# Altium PCB BQ51013a.PcbDoc
Units mil, origin at the board's own origin, x right, y up, seen from the top; angles counter-clockwise.
Board outline 6000 x 4000 mil, 2 copper layers (Top Layer, Bottom Layer); 15 components, 16 nets, 33 pads, 0 vias.
Unrouted connection lines stored in the file: 17.
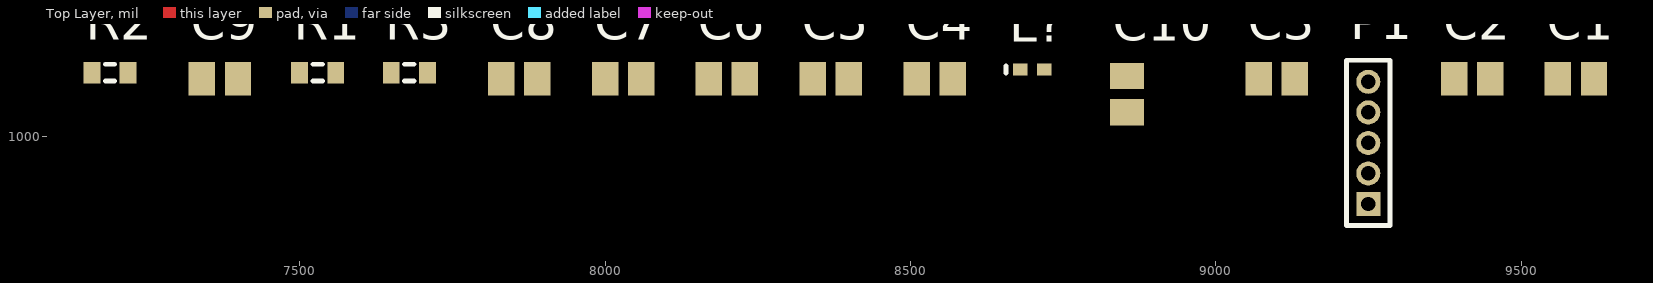
[diagram p0: Top Layer view]
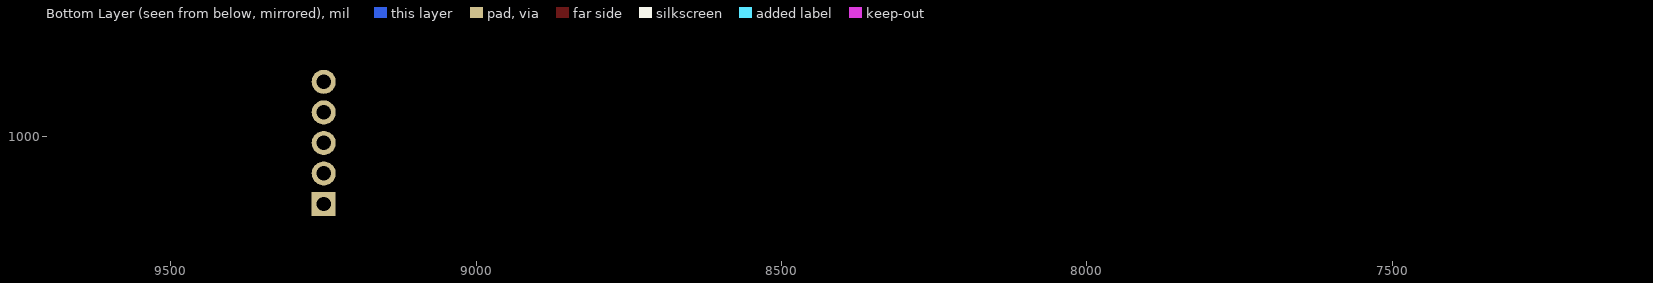
[diagram p1: Bottom Layer view, seen from below]

## Layer stack, top to bottom
Top Solder: solder mask 0.4, Solder Resist, Dk 3.5
Top Layer: signal copper 1.4
Dielectric 1: dielectric 12.6, FR-4, Dk 4.8
Bottom Layer: signal copper 1.4
Bottom Solder: solder mask 0.4, Solder Resist, Dk 3.5

## Board outline
1000,1000 7000,1000 7000,5000 1000,5000

## Design rules (kind name [scope] priority, off if disabled: settings)
Clearance [All] p1: gap=10 ignorepadtopadclearanceinfootprint=FALSE except(0: Arc-Hole Track-Hole SMDPad-Hole THPad-Hole Via-Hole Fill-Hole Poly-Hole Region-Hole Text-Hole)
PolygonConnect [All] p1: connectstyle=Relief reliefconductorwidth=10 reliefentries=4 polygonreliefangle="90 Angle" airgapwidth=10
RoomDefinition BQ51013a [InComponentClass('BQ51013a')] p1: confinementstyle=ConfineIn formatcopy=TRUE lockcomponents=FALSE outline 7134.53,845 9654.53,845 9654.53,1235 7134.53,1235
RoutingVias [All] p1: holewidth=28 width=50 viastyle="Through Hole" minholewidth=28 minwidth=50 maxholewidth=28 maxwidth=50
SolderMaskExpansion [All] p1: expansion=4
Width [All] p1: maxlimit=10 minlimit=10 preferedwidth=10
30 further rules are at their usual default settings.

## Components (designator, comment, footprint, x,y, rotation, side; value= is the part's Value field where it differs from the comment)
C1 "" C0805 9589.53,1095 r0 top value=47nF
C2 "" C0805 9419.53,1095 r0 top value=10nF
C3 "" C0805 9099.53,1095 r0 top value=?uF
C4 "" C0805 8539.53,1095 r0 top value=?uF
C5 "" C0805 8369.53,1095 r0 top value=10nF
C6 "" C0805 8199.53,1095 r0 top value=47nF
C7 "" C0805 8029.53,1095 r0 top value=0.47uF
C8 "" C0805 7859.53,1095 r0 top value=0.47uF
C9 "" C0805 7369.53,1095 r0 top value=?uF
C10 "" C0805 8854.53,1070 r90 top value=?uF
L? "Inductor" 0402-A 8699.53,1110 r0 top value=10mH
P1 "Host" MHDR1X5 9249.53,890 r90 top
R1 "Res3" J1-0603 7529.53,1105 r0 top value=?KO
R2 "" J1-0603 7189.53,1105 r0 top value=140O
R3 "" J1-0603 7679.53,1105 r0 top value=1KO

## Footprints (in the part's own frame and the unit in brackets; to place one, negate y for a bottom-side part, rotate by r counter-clockwise, add the part's x,y. Pads: shape width x height; smd on the part's side, far side on the other; paste and mask are expansions set on the pad)
0402-A [mm] "Chip Inductor, Body 1.0x0.5mm, IPC High Density"
  rect 0.6x0.5 smd: 1(-0.5,0) 2(0.5,0)
  silkscreen extent -1.1,-0.15 -1.1,0.15, body extent -0.55,-0.3 0.55,0.3, height 0.55
C0805 [mm] "Chip Capacitor, Body 2.0x1.3mm, IPC High Density"
  rect 1.1x1.4 smd: 1(-0.75,0) 2(0.75,0)
  body extent -1.1,-0.72 1.1,0.72, height 1.4
J1-0603 [mm] "Chip Resistor, Body 1.6x0.8mm, IPC High Density"
  rect 0.7x0.9 smd: 1(-0.75,0) 2(0.75,0)
  silkscreen extent -0.2,-0.35 0.2,0.35, body extent -0.85,-0.48 0.85,0.48, height 0.9
MHDR1X5 [mm] "Connector; Header; 5 Position"
  rect 1x1 hole 0.6: 1(0,0)
  round 1 hole 0.6: 2(1.27,0) 3(2.54,0) 4(3.81,0) 5(5.08,0)
  silkscreen extent -0.9,-0.9 5.98,0.9

## Part data
C1 C2 C3 C4 C5 C6 C7 C8 C9 C10: library part "Cap Pol3", "Polarized Capacitor (Surface Mount)", LatestRevisionDate=29-May-2009, LatestRevisionNote="IPC-7351 Footprint Added.", PackageDescription="Chip Capacitor", PackageReference=C0805, Published=8-Jun-2000, Publisher="Altium Limited"
P1: library part MHDR1X5, "Header, 5-Pin", LatestRevisionDate=17-Jul-2002, LatestRevisionNote="Re-released for DXP Platform.", Publisher="Altium Limited"
R1: "Resistor", LatestRevisionDate=29-May-2009, LatestRevisionNote="IPC-7351 Footprint Added.", PackageDescription="Chip Resistor", PackageReference=J1-0603, Published=8-Jun-2000, Publisher="Altium Limited"
R2 R3: library part Res3, "Resistor", LatestRevisionDate=29-May-2009, LatestRevisionNote="IPC-7351 Footprint Added.", PackageDescription="Chip Resistor", PackageReference=J1-0603, Published=8-Jun-2000, Publisher="Altium Limited"
L?: Code_IEC=1005, Code_JEITA=0402, LatestRevisionDate=29-May-2009, LatestRevisionNote="IPC-7351 Footprint Added.", PackageDescription="Chip Inductor", PackageReference=0402-A, Published=8-Jun-2000, Publisher="Altium Limited"

## Nets (pads, with @x,y where several pads share a name; then routed paths per layer and width w, separated by ;. In a path a pad name is that pad's centre, name@x,y a point inside that pad or via, vN(x,y) a via of type N, cw(c..) or ccw(c..) an arc to the next point about the centre after c; other vN are vias at no path point)
GND: C9.2 C10.2 P1.5 R2.1 R3.1
NetC1_1: C1.1 C2.1 C3.2 C4.1 C8.1
NetC1_2: C1.2
NetC2_2: C2.2
NetC3_1: C3.1 L?.2
NetC4_2: C4.2 C5.1 C6.1 C7.1 L?.1
NetC5_2: C5.2
NetC6_2: C6.2
NetC7_2: C7.2
NetC8_2: C8.2 R1.1
NetC9_1: C9.1
NetC10_1: C10.1 P1.1
NetP1_2: P1.2
NetP1_3: P1.3 R3.2
NetP1_4: P1.4
NetR1_2: R1.2 R2.2